# Altium PCB AD835.PcbDoc
Units mil, origin at the board's own origin, x right, y up, seen from the top; angles counter-clockwise.
Board outline 1393 x 917 mil, 2 copper layers (Top Layer, Bottom Layer); 31 components, 18 nets, 95 pads, 101 vias.
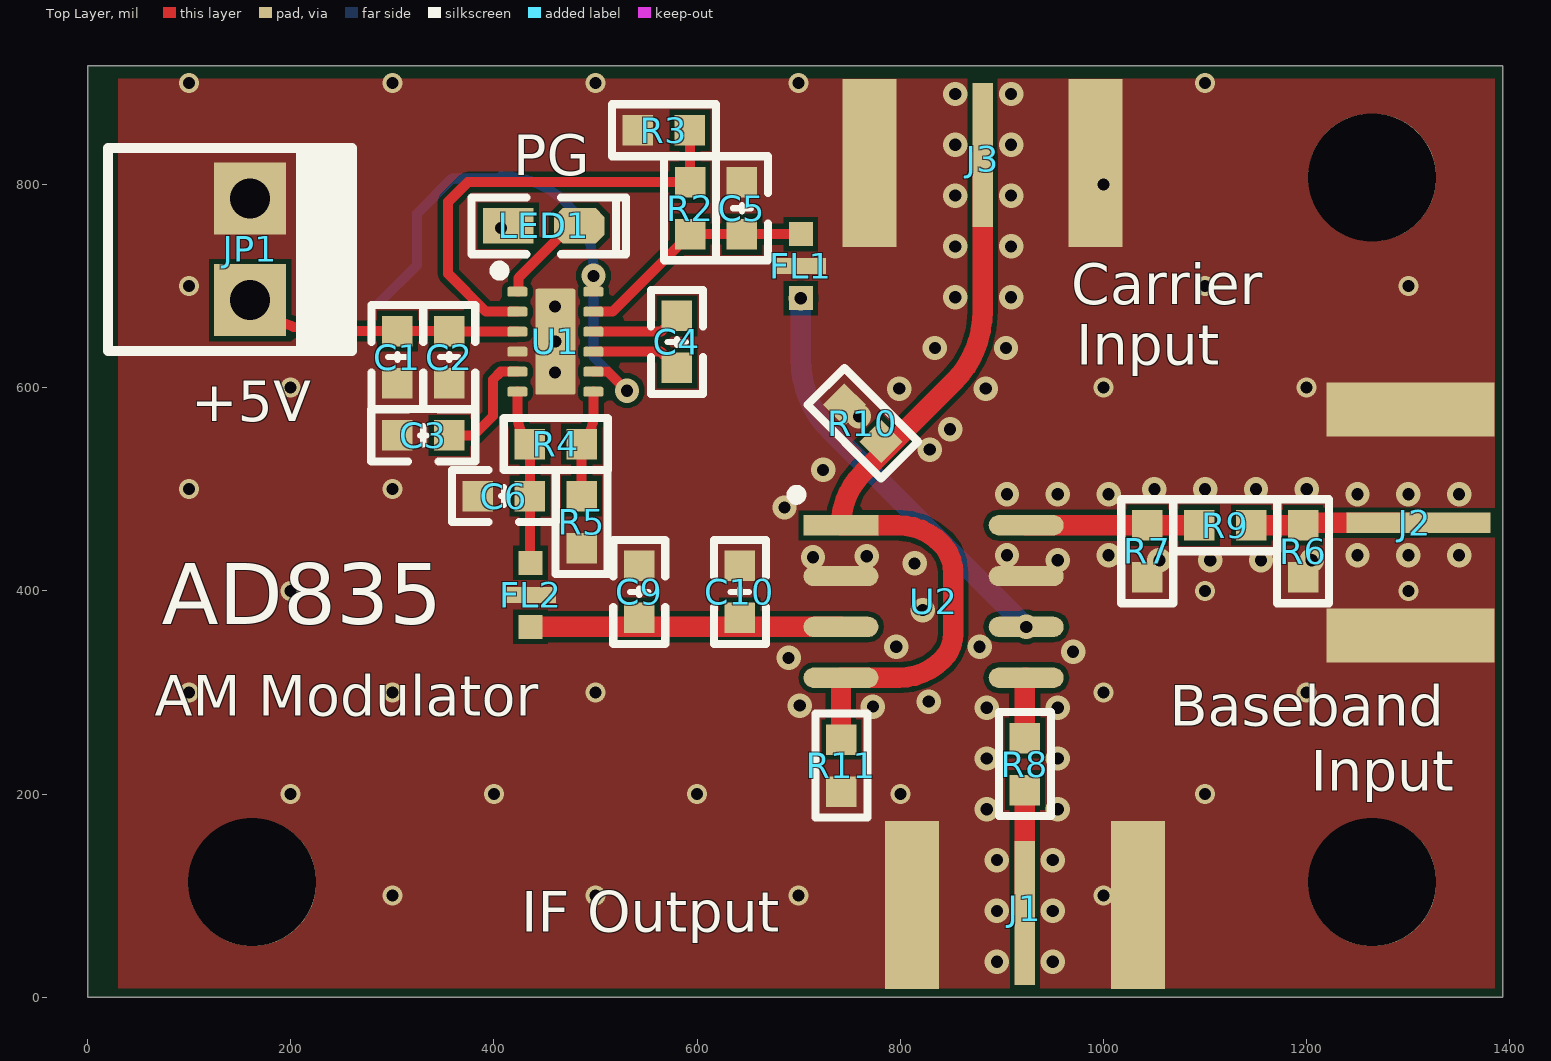
[diagram p0: Top Layer view]
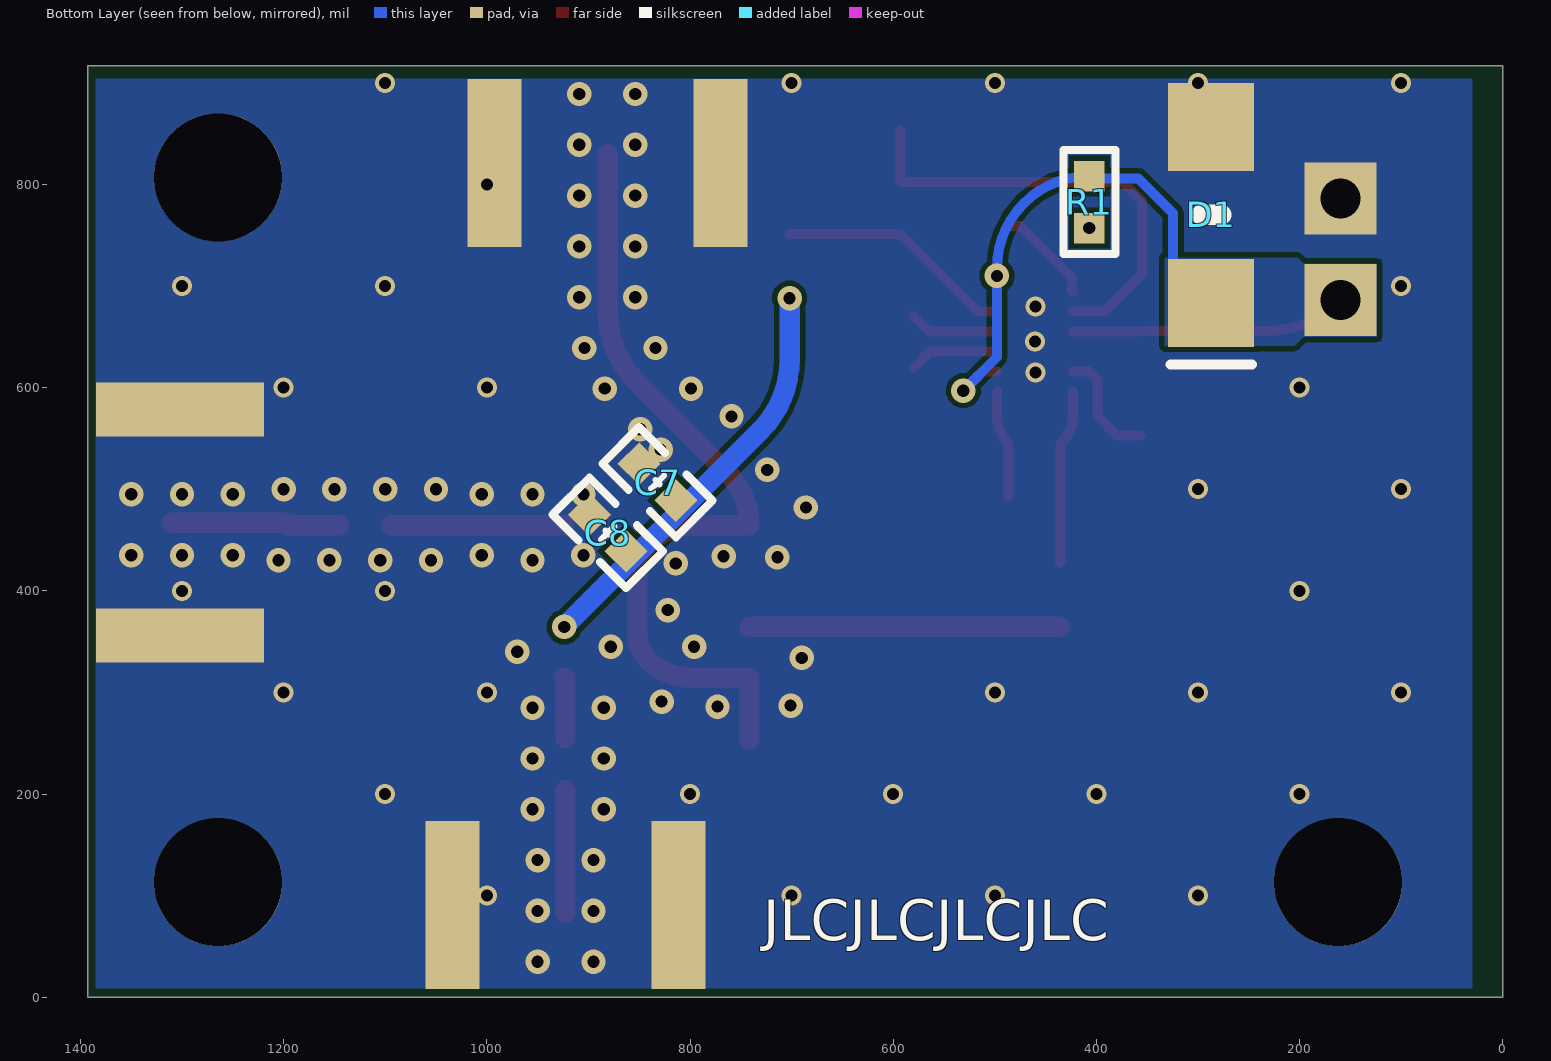
[diagram p1: Bottom Layer view, seen from below]
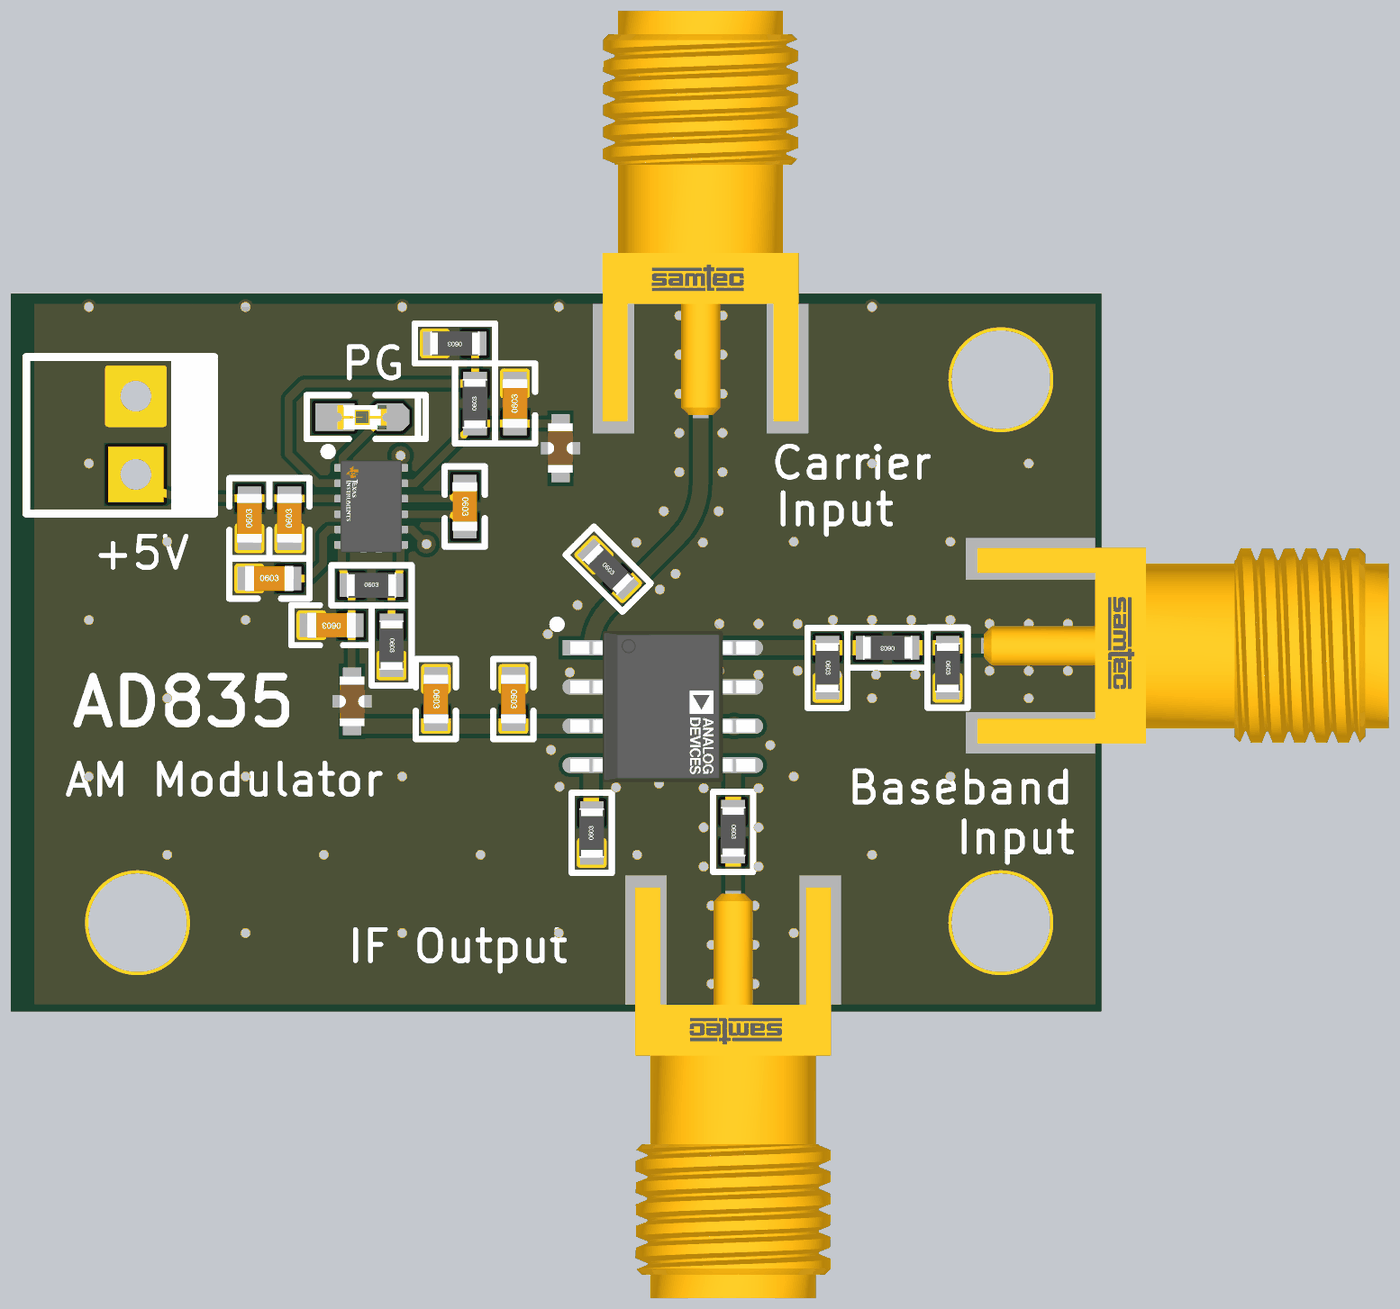
[diagram p2: 3D render of the assembled board from above, using the file's embedded part models]
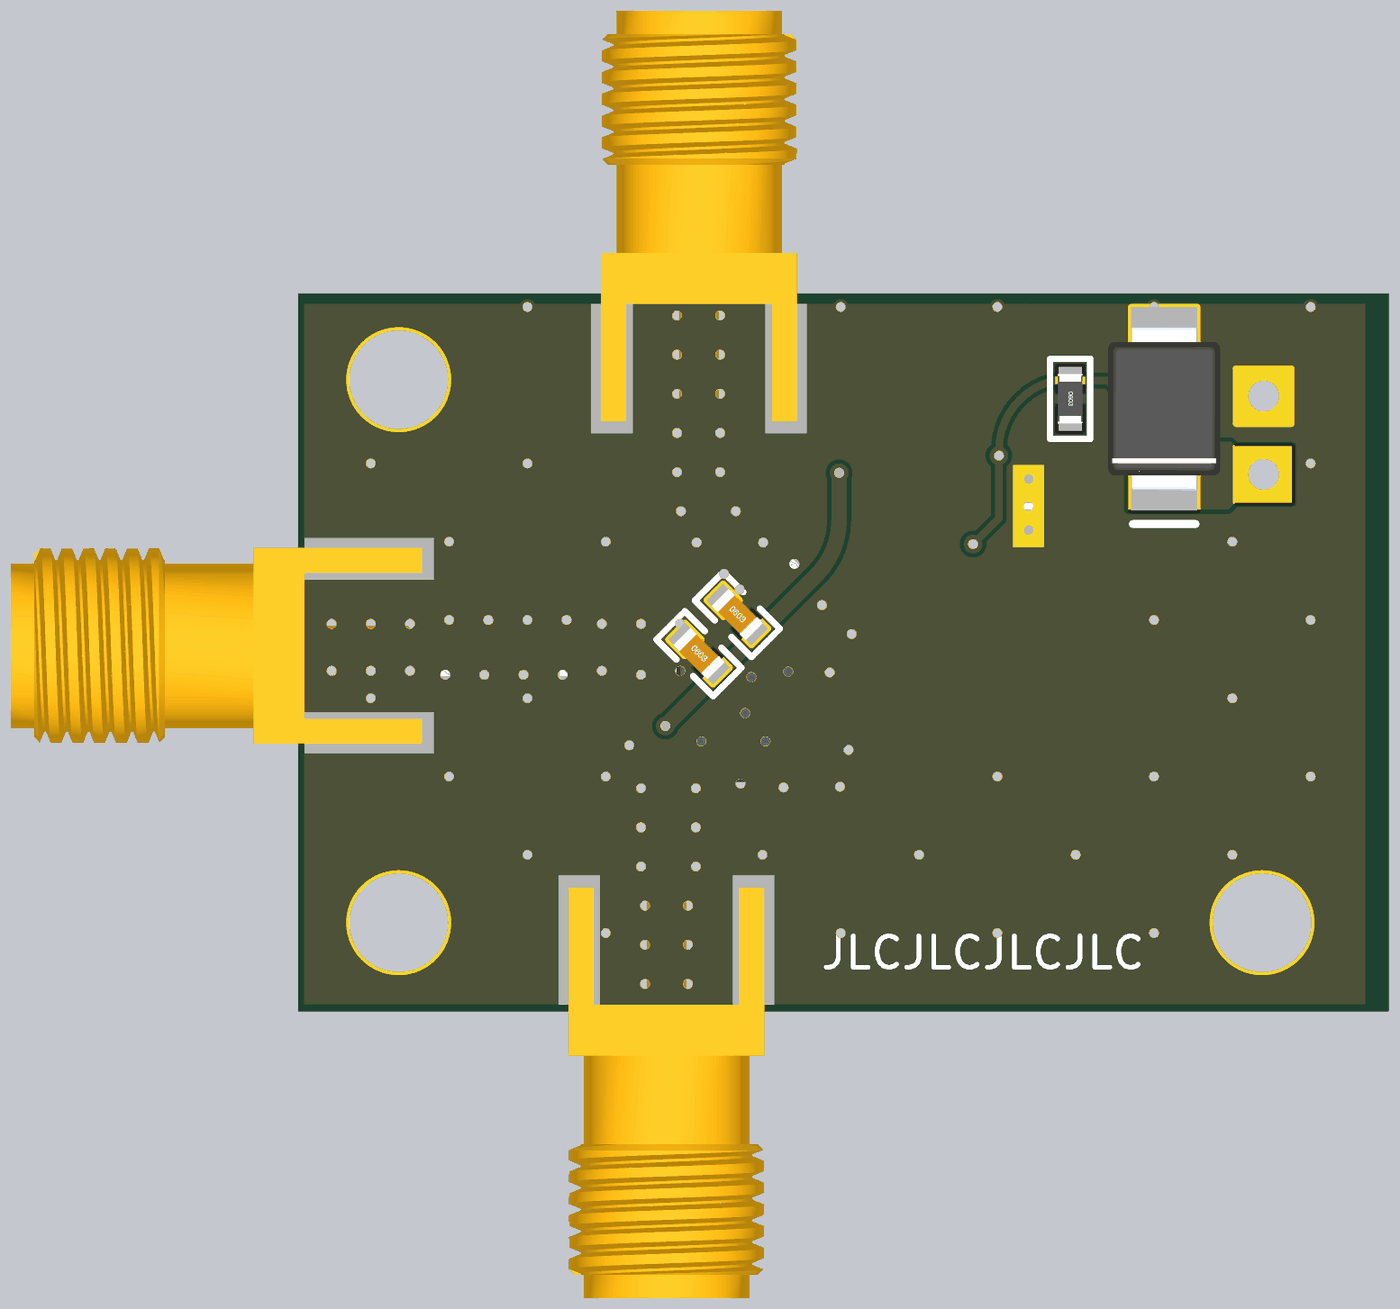
[diagram p3: 3D render of the assembled board from below, using the file's embedded part models]

## Layer stack, top to bottom
Top Solder: solder mask 0.4, Solder Resist, Dk 3.5
Top Layer: signal copper 1.4
Dielectric 1: dielectric 12.6, FR-4, Dk 4.8
Bottom Layer: signal copper 1.4
Bottom Solder: solder mask 0.4, Solder Resist, Dk 3.5

## Board outline
0,0 0,917 1393,917 1393,0

## Design rules (kind name [scope] priority, off if disabled: settings)
Clearance [All] p1: gap=5 ignorepadtopadclearanceinfootprint=FALSE
PlaneConnect [All] p1: planeconnectstyle=Direct reliefexpansion=20 reliefentries=4 reliefconductorwidth=10 reliefairgap=10
PolygonConnect [All] p1: connectstyle=Direct reliefconductorwidth=10 reliefentries=4 polygonreliefangle="90 Angle" airgapwidth=10
RoutingVias [All] p1: holewidth=12 width=24 viastyle="Through Hole" minholewidth=12 minwidth=24 maxholewidth=300 maxwidth=300
SolderMaskExpansion [All] p1: expansion=4 istentingtop=FALSE
Width [All] p1: maxlimit=20 minlimit=9.84 preferedwidth=10 checkconnectedcopper=TRUE
29 further rules are at their usual default settings.

## Components (designator, comment, footprint, x,y, rotation, side; value= is the part's Value field where it differs from the comment)
C1 "4.7uF" "C 0603_L" 305,630 r90 top
C2 "100nF" "C 0603_L" 356,630 r90 top
C3 "4.7uF" "C 0603_L" 330.41,553 r0 top
C4 "1uF" "C 0603_L" 580,645 r270 top
C5 "4.7uF" "C 0603_L" 644.1,776.57 r90 top
C6 "4.7uF" "C 0603_L" 409.75,493.3 r180 top
C7 "1uF" "C 0603_L" 832,507 r225 bottom
C8 "100nF" "C 0603_L" 881,457 r225 bottom
C9 "1uF" "C 0603_L" 543,399 r270 top
C10 "100nF" "C 0603_L" 642,399 r270 top
D1 "SMBJ5.0A" SMBJ5.0A 287,770 r90 bottom
FL1 "NFM18PC104R1C3D" FIL_NFM18PC104R1C3D 702,719.48 r270 top
FL2 "NFM18PC104R1C3D" FIL_NFM18PC104R1C3D 436,396 r270 top
J1 "SMA-J-P-H-ST-EM1" FP-SMA-J-P-H-ST-EM1-MFG 922.52,-179.2 r0 top
J2 "SMA-J-P-H-ST-EM1" FP-SMA-J-P-H-ST-EM1-MFG 1572.2,467 r90 top
J3 "SMA-J-P-H-ST-EM1" FP-SMA-J-P-H-ST-EM1-MFG 881,1091.2 r180 top
JP1 "HDR-1X2" KF2510-LI-2P 160,736 r270 top
LED1 "蓝色" "LED 0603B" 449,759 r0 top
R1 "20K" "R 0603_L" 407,782.59 r270 bottom
R2 "270K" "R 0603_L" 593,776.59 r90 top
R3 "100K" "R 0603_L" 567.32,853.31 r180 top
R4 "270K" "R 0603_L" 460.81,544.39 r0 top
R5 "100K" "R 0603_L" 486.34,467.57 r270 top
R6 "?" "R 0603_L" 1196.44,438.99 r270 top
R7 "?" "R 0603_L" 1043,438.91 r270 top
R8 "0" "R 0603_L" 922.52,229.43 r270 top
R9 "?" "R 0603_L" 1119.74,464.54 r180 top
R10 "100" "R 0603_L" 763,565 r315 top
R11 "100" "R 0603_L" 742,228 r90 top
U1 "LM27762DSSR" FP-DSS0012B-MFG 460.4,645.16 r0 top
U2 "AD835ARZ" FP-R-8-IPC_C 832.69,389.5 r0 top

## Footprints (in the part's own frame and the unit in brackets; to place one, negate y for a bottom-side part, rotate by r counter-clockwise, add the part's x,y. Pads: shape width x height; smd on the part's side, far side on the other; paste and mask are expansions set on the pad)
"C 0603_L" [mil] "无极性贴片电容"
  rect 30x30 smd: 1(-25.59,0) 2(25.59,0)
  silkscreen extent -51,-26 51,26, body extent -31,-16 31,16, height 32
FIL_NFM18PC104R1C3D [mm]
  rect 0.6x0.6 smd mask+0: 1(-0.8,0) 3(0.8,0)
  rect 0.4x1.27 smd mask+0: 2(0,0)
  rect 0.4x1.27 on Top Solder mask+0: ""(0,0)
  body extent -0.8,-0.4 0.8,0.4, height 0.7
FP-DSS0012B-MFG [mm]
  rrect40% 0.5x0.25 smd paste+0 mask+0: 1(-0.95,1.25) 2(-0.95,0.75) 3(-0.95,0.25) 4(-0.95,-0.25) 5(-0.95,-0.75) 6(-0.95,-1.25) 7(0.95,-1.25) 8(0.95,-0.75) 9(0.95,-0.25) 10(0.95,0.25) 11(0.95,0.75) 12(0.95,1.25)
  rrect10% 1x2.65 smd paste-1000 mask+0: 13(0,0)
  silkscreen extent -1.52,1.65 -1.27,1.9, body extent -1.3,-1.65 1.3,1.65, height 0.25
FP-R-8-IPC_C [mil]
  rect 73.78x20 smd paste+0 mask+0: 1(-91.18,75)
  rrect100% 73.78x20 smd paste+0 mask+0: 2(-91.18,25) 3(-91.18,-25) 4(-91.18,-75) 5(91.18,-75) 6(91.18,-25) 7(91.18,25) 8(91.18,75)
  silkscreen extent -140,100 -130,110, body extent -132,-100 132,100, height 10
FP-SMA-J-P-H-ST-EM1-MFG [mm]
  rect 0.508x3.6 smd paste+0 mask+0: 1(0,6.66)
  rect 1.35x4.2 smd paste+0 mask+0: 2(-2.825,6.86) 2(2.825,6.86)
  rect 1.35x4.2 smd far side paste+0 mask+0: 2(-2.825,6.86) 2(2.825,6.86)
  body extent -3.6,-4.92 3.6,9.06, height 0.25
KF2510-LI-2P [mm] "接插件/2A"
  rect 1.8x1.8 hole 1: 1(-1.27,0) 2(1.27,0)
  silkscreen extent -2.59,-3.56 2.54,2.54, body extent -2.54,-3.5 2.54,2.4, height 11.05
"LED 0603B" [mil] "蓝色0603LED"
  rect 50x35 smd: 1(-35,0.26)
  oct 50x35 smd: 2(35,0.26)
  silkscreen extent -71,-28 81,28, body extent -31,-16 32,16, height 24
"R 0603_L" [mil] "1/10W贴片电阻 https://item.taobao.com/item.htm?ft=t&id=613637044352"
  rect 30x30 smd: 1(-25.59,0) 2(25.59,0)
  silkscreen extent -51,-26 51,26, body extent -31,-16 31,16, height 16
SMBJ5.0A [mm]
  rect 2.2x2.15 smd: 1(-2.2,0) 2(2.2,0)
  silkscreen extent -3.74,-1.02 0,1.02, body extent -2.68,-1.81 2.68,1.81, height 2.65

## Part data
C1 C2 C3 C4 C5 C6 C7 C8 C9 C10: library part C, "贴片电容", BOM名称=贴片电容, 下单链接=https://item.taobao.com/item.htm?ft=t&id=613637044352, 淘宝ID=小糖豆的小窝窝
D1: "SMBJX.XA Seires TVS", Package="DO-214 Littelfuse", Availability="In Stock", Check_prices=https://www.snapeda.com/parts/SMBJ5.0A/Littelfuse+Inc/view-part/?ref=eda, MF=Littelfuse, MP=SMBJ5.0A, Price=None, Purchase-URL=https://pricing.snapeda.com/search/part/SMBJ5.0A/?ref=eda, SnapEDA_Link=https://www.snapeda.com/parts/SMBJ5.0A/Littelfuse+Inc/view-part/?ref=snap
FL1 FL2: "SMD Capacitor with Capacitance: 0.10uF Tol. 20%. Rated Voltage: 16Vdc", Package=NONSTANDARD, Digi-Key_Part_Number=490-6969-1-ND, Digi-Key_Purchase_URL=https://www.digikey.com/product-detail/en/murata-electronics/NFM18PC104R1C3D/490-6969-1-ND/3846166?utm_source=snapeda&utm_medium=aggregator&utm_campaign=symbol, MF=Murata, MP=NFM18PC104R1C3D, SnapEDA_Link=https://www.snapeda.com/parts/NFM18PC104R1C3D/Murata/view-part/4375738/?ref=snap
J1 J2 J3: library part CMP-02754-000006-1, "CONN SMA JACK STR 50OHM EDGE MNT", Case/Package=SMA, Dielectric Material=PTFE, Housing Color=Gold, Max Frequency=6GHz, Max Operating Temperature=125°C, Min Operating Temperature=-65°C, Package Quantity=1, Voltage Rating=335V, Body Material=Brass, Body Plating=Gold, Center Contact Plating=Gold, Connector Type=SMA, Contact Material=Copper, Contact Plating=Gold, Depth=13.33mm, Fastening Type=Threaded, Impedance=50R, Insulation Material=Polytetrafluoroethylene, Length=6.35mm, Mount=Edge, Orientation=Straight, Packaging=Tray, Radiation Hardening=No, RoHS Compliant=Yes, Series=SMA, Termination=Solder
JP1: library part "Header 2", "2P接插件", BOM名称=2P接插件, 下单链接=https://item.taobao.com/item.htm?ft=t&id=613637044352, 淘宝ID=小糖豆的小窝窝
LED1: library part LED-SMD, "贴片LED", BOM名称=贴片LED, 下单链接=https://item.taobao.com/item.htm?ft=t&id=613637044352, 淘宝ID=小糖豆的小窝窝
R1 R2 R3 R4 R5 R6 R7 R8 R9 R10 R11: library part R, "贴片电阻", BOM名称=贴片电阻, 下单链接=https://item.taobao.com/item.htm?ft=t&id=613637044352, 淘宝ID=小糖豆的小窝窝
U1: "IC REG CHARGE PUMP ADJ DL 12WSON", Max Input Voltage=5.5V, Max Operating Temperature=85°C, Max Output Voltage=5V, Min Input Voltage=2.7V, Min Operating Temperature=-40°C, Min Output Voltage=1.5V, Output Current=250mA, Quiescent Current=390uA, Switching Frequency=2.3MHz, Lead Free="Lead Free", Mount="Surface Mount", Output Type=Adjustable, Packaging="Tape and Reel", Synchronous Rectifier=No, Topology="Charge Pump"
U2: "ANALOG MULTIPLIER OR DIVIDER, 25", Case/Package=SOIC, Dual Supply Voltage=5V, Max Dual Supply Voltage=5.5V, Max Frequency=250MHz, Max Input Voltage=1V, Max Operating Temperature=85°C, Max Power Dissipation=300mW, Min Dual Supply Voltage=4.5V, Min Operating Temperature=-40°C, Nominal Supply Current=16mA, Operating Supply Current=25mA, Output Voltage=2.5V, Package Quantity=1, -3db Bandwidth=250MHz, Accuracy=2%, Contact Plating=Tin, Height=1.5mm, Lead Free="Contains Lead", Length=5mm, Max Supply Voltage=5.5V, Min Supply Voltage=4.5V, Mount="Surface Mount", Number of Amplifiers=3, Number of Bits=4, Number of Channels=2, Number of Circuits=1, Number of Elements=1, Number of Pins=8, Operating Supply Voltage=5V, Packaging=Rail/Tube, Radiation Hardening=No, REACH SVHC="No SVHC", RoHS Compliant=Yes, Series=-, Settling Time=20ns, Slew Rate=1000V/µs, Supply Current=16mA, Width=4mm

## Free pads (board coordinates)
  round 125.98 hole 125.98: 1(162.07,113.17) 1(1264.43,113.17) 1(1264.43,807)

## Via types
v1: diameter 24, hole 12, Top Layer to Bottom Layer, tented both sides, 67 vias
v2: diameter 19.68, hole 11.81, Top Layer to Bottom Layer, tented both sides, 34 vias

## Nets (pads, with @x,y where several pads share a name; then routed paths per layer and width w, separated by ;. In a path a pad name is that pad's centre, name@x,y a point inside that pad or via, vN(x,y) a via of type N, cw(c..) or ccw(c..) an arc to the next point about the centre after c; other vN are vias at no path point)
+4.5: C7.2 C8.2 FL1.3 U2.6 | length 411.1
  Bottom Layer w20: v1(702,687.99) 702,627.8 ccw(c802,627.8) 731.29,557.09 806.69,481.69 v1(923.87,364.5)
+5: C1.2 C2.2 D1.1 JP1.2 R1.1 U1.3 U1.8 U1.12 | length 807.3
  Top Layer w9.84: JP1.2 161.12,684.88 ccw(c231.83,755.59) 231.83,655.59 C1.2 C2.2 ccw(c357.42,657.01) 357.42,655 U1.3 ; U1.8 512.37,615.63 v1(531,597) ; U1.12 497.9,694.37 497.9,709.9 v1(498,710)
  Bottom Layer w9.84: D1.1@256,684.39 D1.1@256,685.37 ; D1.1 324.4,720.79 324.4,771.4 359,806 404.82,806 R1.1 cw(c407,717.18) 498,717.18 v1(498,710) 498,630 v1(531,597)
-4.5: C9.2 C10.2 FL2.3 U2.3 | length 305.5
  Top Layer w20: FL2.3 543,364.5 651,364.5 U2.3
FB+: R2.2 R3.1 U1.2 | length 451.6
  Top Layer w9.84: U1.2 392.31,674.69 355,712 355,783 374.18,802.18 R2.2 593,853.23 R3.1
FB-: R4.2 R5.1 U1.7 | length 105.9
  Top Layer w9.84: R5.1 486.4,493.22 R4.2 ccw(c458.86,571.92) 497.8,571.92 U1.7
GND: C1.1 C2.1 C3.1 C5.2 C6.2 C7.1 C8.1 C9.1 C10.1 D1.2 FL1.2 FL2.2 J1.2 J2.2 J3.2 JP1.1 pad.1 R3.2 R5.2 R6.2 R7.2 R10.1 R11.1 U1.4 U1.13 U2.2 U2.7
  other v1: 895,35 950,35 895,85 950,85 895,135 950,135 885,185 955,185 885,235 955,235 885,285 955,285 773,286 701,287 828,291 690,334 970,340 796,345 878,345 822,381 814,427 955,430 1055,430 1105,430 1155,430 1205,430 714,433 767,434 905,435 1005,435 1250,435 1300,435 1350,435 686,482 905,495 955,495 1005,495 1250,495 1300,495 1350,495 1050,500 1100,500 1150,500 1200,500 724,519 829,539 849,559 759.18,571.65 799,599 884,599 834,639 904,639 854,689 909,689 854,739 909,739 854,789 909,789 854,839 909,839 854,889 909,889
  other v2: 300,100 500,100 700,100 1000,100 200,200 400,200 600,200 800,200 1100,200 100,300 300,300 500,300 1000,300 1200,300 200,400 1100,400 1300,400 100,500 300,500 200,600 1000,600 1200,600 460,615 460.4,645.16 460,680 100,700 1100,700 1300,700 1000,800 100,900 300,900 500,900 700,900 1100,900
NetC3_2: C3.2 U1.5 | length 114
  Top Layer w9.84: C3.2 380,553 399,572 399,608 406.63,615.63 U1.5
NetC4_1: C4.1 U1.10 | length 88.7
  Top Layer w9.84: U1.10 564.4,655 C4.1
NetC4_2: C4.2 U1.9 | length 88.8
  Top Layer w9.84: U1.9 564.09,635.32 C4.2
NetJ1_1: J1.1 R8.2 | length 120.8
  Top Layer w20: J1.1 R8.2
NetJ2_1: J2.1 R6.1 R9.1 | length 165.7
  Top Layer w20: R9.1@1145.35,464.57 R6.1 ; R6.1 1198.85,467 J2.1
NetJ3_1: J3.1 R10.2 R11.2 U2.1 U2.4 | length 804.1
  Top Layer w20: U2.4 741.5,254.79 ccw(c743.21,254.79) R11.2 ; U2.4@742.5,314.5 798.74,314.5 ccw(c798.74,374.89) 841.45,332.19 ccw(c815.98,357.66) 852,357.66 852,418.03 ccw(c811.03,418.03) 840,447 ccw(c797.74,404.74) 797.74,464.5 U2.1 cw(c813.93,464.5) 762.72,515.72 851.71,604.71 ccw(c781,675.42) 881,675.42 J3.1@881,829.55
NetLED1_1: LED1.1 R1.2
  other v1: 407,757
NetLED1_2: LED1.2 U1.1 | length 95.9
  Top Layer w9.84: U1.1 424.09,694.37 424.09,708.09 475.26,759.26 LED1.2
NetR7_1: R7.1 R9.2 U2.8 | length 170.3
  Top Layer w20: U2.8 R7.1 R9.2
NetR8_1: R8.1 U2.5 | length 60.8
  Top Layer w20: R8.1 922.52,314.5 U2.5
OUT+: C5.1 FL1.1 R2.1 U1.11 | length 235.8
  Top Layer w9.84: U1.11 516.69,674.69 R2.1 C5.1 FL1.1
OUT-: C6.1 FL2.1 R4.1 U1.6 | length 171.9
  Top Layer w9.84: U1.6 423,573.88 ccw(c464.71,573.88) R4.1 435.34,544.25 C6.1 435.34,429.08 ccw(c437.58,429.08) FL2.1
pads on no net: FL1. FL2.

## Polygon pours and split planes (outlines as drawn)
GND on Bottom Layer "NONET_L-01_P-001" (solid, remove dead copper, pour order 3): 30,904 30,9 1385,9 1385,904
+5 on Bottom Layer "+5_L-01_P-001" (solid, remove dead copper, pour order 0): 333,728 202,728 196,722 124,722 124,650 196,650 205,641 333,641
GND on Top Layer "NONET_L-01_P-001" (solid, remove dead copper, pour order 2): 30,904 30,9 1385,9 1385,904
no net on Bottom Solder "NONET_L-01_P-001" (solid): 440,698 440,593 480,593 480,698

## Silkscreen, mask and mechanical layers (free items; w line width, h text height)
Top Overlay:
  text "PG" at 419,809 h40
  text "Carrier" at 968,682 h40
  text "Input" at 973,622.33 h40
  text "+5V" at 102,567 h40
  text "AD835" at 73,367 h60
  text "AM Modulator" at 66,277 h40
  text "Baseband" at 1065,267 h40
  text "Input" at 1204,203.33 h40
  text "IF Output" at 427,64.33 h40
Bottom Overlay:
  text "JLCJLCJLCJLC" at 728,56 h40
Mechanical 1:
  the board outline again, w6